# Altium PCB kijek.PcbDoc
Units mil, origin at the board's own origin, x right, y up, seen from the top; angles counter-clockwise.
Board outline 3346.46 x 826.77 mil, 2 copper layers (Top Layer, Bottom Layer); 72 components, 60 nets, 274 pads, 79 vias.
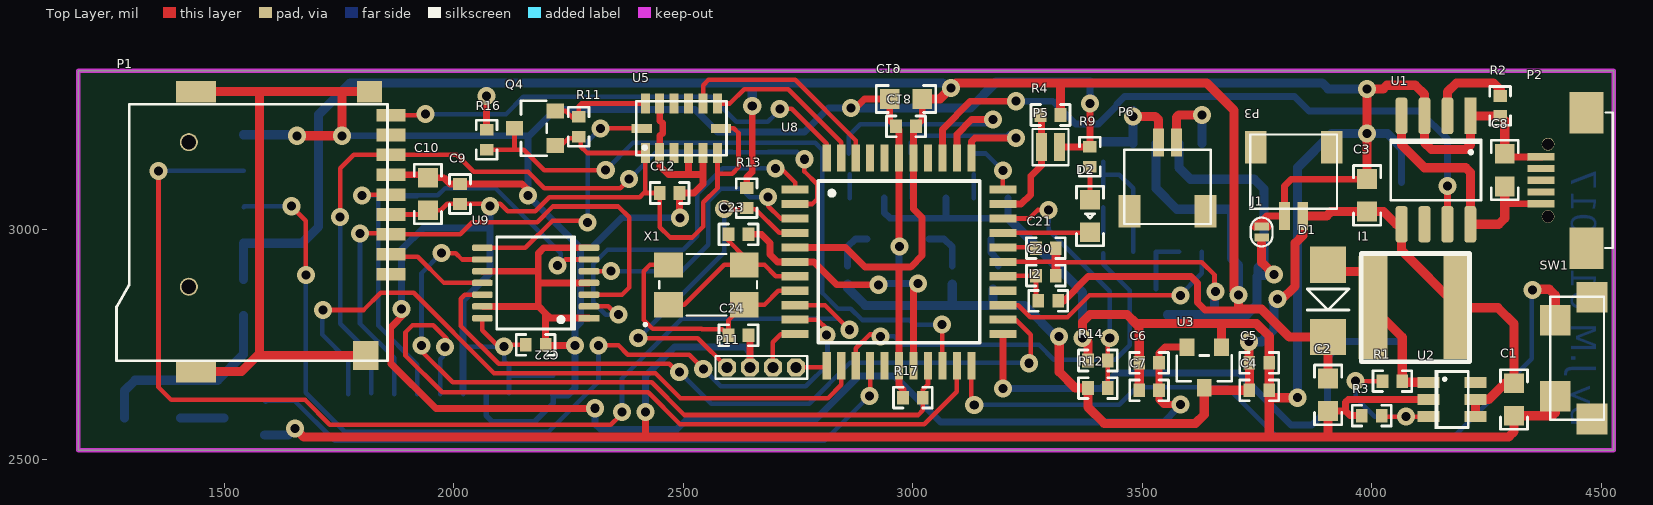
[diagram p0: Top Layer view]
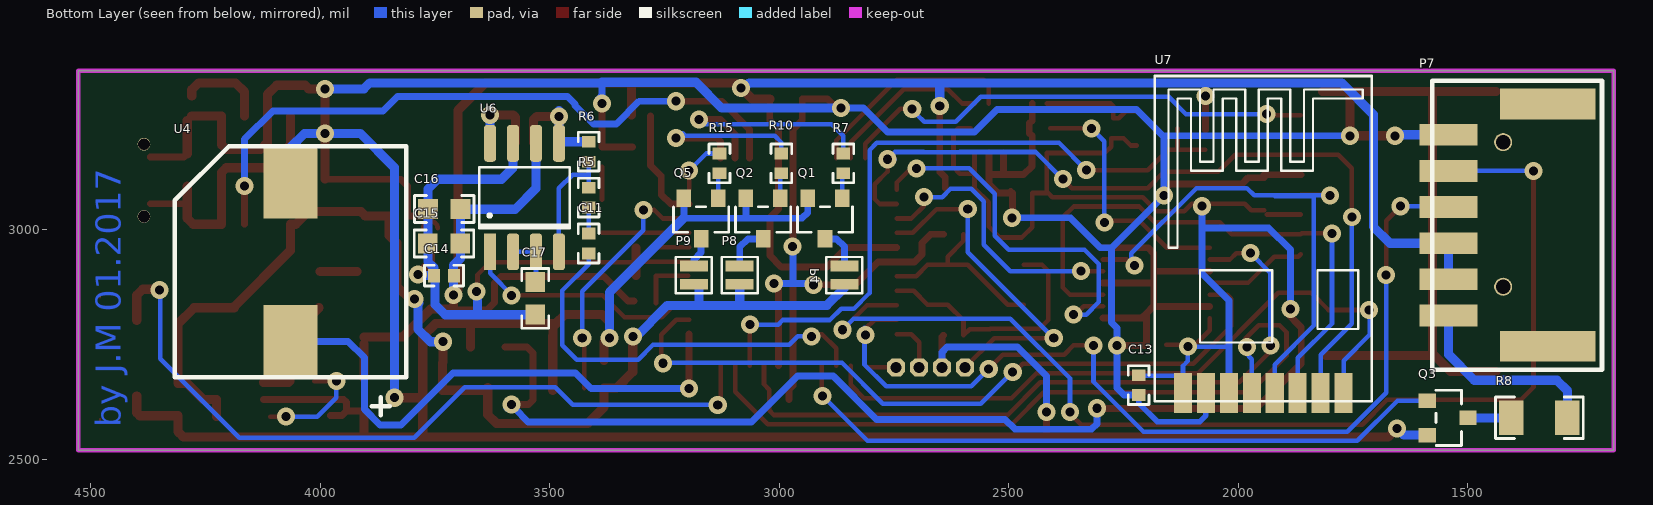
[diagram p1: Bottom Layer view, seen from below]

## Layer stack, top to bottom
Top Layer: signal copper 1.4
Dielectric: dielectric 12.6, FR-4, Dk 4.8
Bottom Layer: signal copper 1.4

## Board outline
1181.1,2519.68 1181.1,3346.46 4527.56,3346.46 4527.56,2519.68

## Design rules (kind name [scope] priority, off if disabled: settings)
Clearance [All] p1: gap=10
MinimumSolderMaskSliver [All] p1: minsoldermaskwidth=1
PolygonConnect [All] p1: connectstyle=Relief reliefconductorwidth=10 reliefentries=4 polygonreliefangle="90 Angle" airgapwidth=10
RoutingVias [All] p1: holewidth=19.68 width=39.37 viastyle="Through Hole" minholewidth=19.68 minwidth=39.37 maxholewidth=28 maxwidth=50
SolderMaskExpansion [All] p1: expansion=4
Width [All] p1: maxlimit=20 minlimit=10 preferedwidth=10
27 further rules are at their usual default settings.

## Components (designator, comment, footprint, x,y, rotation, side; value= is the part's Value field where it differs from the comment)
C1 "22uF" C0603 4310,2630 r270 top
C2 "22uF" C0603 3905,2640 r270 top
C3 "4,7uF" C0603 3990,3074.78 r90 top
C4 "1uF" C0402 3755,2650 r0 top
C5 "100nF" C0402 3755,2710 r0 top
C6 "100nF" C0402 3515,2710 r180 top
C7 "1uF" C0402 3515,2650 r180 top
C8 "4,7uF" C0603 4290,3130 r90 top
C9 "100nF" C0402 2013.15,3077.87 r90 top
C10 "4,7uF" C0603 1943.15,3077.87 r90 top
C11 "470nF" C0402 3415,2970 r90 bottom
C12 "100nF" C0402 2470,3080 r0 top
C13 "100nF" C0402 2216.54,2661.42 r270 bottom
C14 "100nF" C0402 3730.43,2900 r0 bottom
C15 "4,7uF" C0603 3730.43,2970 r0 bottom
C16 "4,7uF" C0603 3730,3045 r0 bottom
C17 "4,7uF" C0603 3531.5,2850.39 r270 bottom
C18 "100nF" C0402 2985,3225 r180 top
C19 "4,7uF" C0603 2985,3285 r180 top
C20 "100nF" C0402 3290,2900 r180 top
C21 "100nF" C0402 3290,2960 r0 top
C22 "100nF" C0402 2178.07,2748.98 r0 top
C23 "22pF" C0402 2620,2990 r180 top
C24 "22pF" C0402 2620,2770 r0 top
D1 "SS34" SMA 3905,2845 r90 top
D2 "RED" LED0603 3386,3030 r90 top
I1 "22uH" 6x6x2.8mm 4095,2830 r180 top
I2 "10uH" I0402 3295,2845 r180 top
J1 "SOLDER_JUMPER" SOLDER_JUMPER 3760,2995 r90 top
P1 "MICROSD" MICROSD 1863.15,2860 r0 top
P2 "USB" MICRO_USB_2 4468,2960 r90 top
P3 "A1001WR-S-2P" A1001WR-S-2P 3830,3105 r180 top
P4 "Header 2" 2MM-SMD 2858,2901 r90 bottom
P5 "Header 2" 2MM-SMD 3300,3180 r0 top
P6 "A1001WR-S-2P" A1001WR-S-2P 3555,3115 r0 top
P7 "CON" MX-502352-0600 1433.15,3010 r90 bottom
P8 "Header 2" 2MM-SMD 3086,2901 r90 bottom
P9 "Header 2" 2MM-SMD 3186,2901 r90 bottom
P11 "DEBUG" PAD_4-1 2670,2700 r0 top
Q1 "BC847B" SOT23 2900,3024.49 r0 bottom
Q2 "BC847B" SOT23 3035,3024.49 r0 bottom
Q3 "2N7002" SOT23 1543.15,2590 r270 bottom
Q4 "2N7002" SOT23 2176.26,3221.06 r90 top
Q5 "BC847B" SOT23 3170,3024.49 r0 bottom
R1 "100K" R0402 4045,2670 r180 top
R2 "1K2" R0402 4280,3270 r90 top
R3 "15K" R0402 4000,2595 r180 top
R4 "10k" R0402 3300,3250 r0 top
R5 "20K" R0402 3415,3070 r90 bottom
R6 "20K" R0402 3415,3170 r90 bottom
R7 "9K6" R0402 2860,3144.49 r90 bottom
R8 "16R" R1206 1343.15,2590 r0 bottom
R9 "1K" R0402 3386,3159 r90 top
R10 "9K6" R0402 2995,3144.49 r90 bottom
R11 "4K7" R0402 2271.65,3224.41 r90 top
R12 "1M" R0402 3403.35,2655 r180 top
R13 "10K" R0402 2638,3069 r270 top
R14 "1M" R0402 3403.35,2715 r180 top
R15 "9K6" R0402 3130,3144.49 r90 bottom
R16 "4K7" R0402 2071.26,3196.06 r270 top
R17 "4K7" R0402 3000,2633.86 r0 top
SW1 "SW_3x6x3.5mm" 3x6x3.5mm 4440,2720 r270 top
U1 "TP4056" SO-8 4140,3130 r270 top
U2 "MT3608" SOT-23-6 4175,2630 r270 top
U3 "XC6206" SOT23 3635,2700 r180 top
U4 "SMB07" SMB07 4065,2930 r90 bottom
U5 "ADXL345" LGA_CC-14 2495.63,3221.06 r90 top
U6 "LM4871" SO-8 3555,3070 r90 bottom
U7 "NRF24L01" NRF24L01 1945,2644 r90 bottom
U8 "ATmega644" TQFP-44A 2970,2930 r0 top
U9 "74LCV125" TSSOP-14 2178.07,2883.98 r180 top
X1 "18,432MHz" CFPX-104 2550,2880 r0 top

## Footprints (in the part's own frame and the unit in brackets; to place one, negate y for a bottom-side part, rotate by r counter-clockwise, add the part's x,y. Pads: shape width x height; smd on the part's side, far side on the other; paste and mask are expansions set on the pad)
2MM-SMD [mm]
  rect 0.6x1.55 smd: 1(-0.5,0) 2(0.5,0)
  silkscreen extent -1,-1 1,1
3x6x3.5mm [mm]
  rect 1.7x1.7 smd: 1(-2.1,-1.016) 2(2.1,-1.016) 3(-3.37,1.016) 3(3.37,1.016)
  Top Layer lines w0.127: 3.4,1.016 3.37,1.016 ; -3.37,1.016 -3.4,1.016
  silkscreen extent -3.4,-1.3 3.4,1.68, body extent -3.9,-1.1 3.9,2.5, height 3.5
6x6x2.8mm [mm]
  rect 1.6x5.7 smd: 1(-2.35,0) 2(2.35,0)
  silkscreen extent -3,-3 3,3, body extent -3,-3 3,3, height 2.8
A1001WR-S-2P [mm]
  rect 0.6x1.55 smd: 1(-0.5,1.9) 2(0.5,1.9)
  rect 1.2x1.8 smd: 3(-2.1,-1.9) 3(2.1,-1.9)
  silkscreen extent -2.4,-2.6 2.4,1.5, body extent -2.46,-2.66 2.46,1.56, height 2.9
C0402 [mm] "Chip Resistor, Body 1.0x0.5mm, IPC Low Density"
  rect 0.65x0.75 smd: 1(-0.55,0) 2(0.55,0)
  silkscreen extent -1.07,-0.58 1.07,0.58, body extent -0.52,-0.28 0.53,0.28, height 0.4
C0603 [mm] "Chip Resistor, Body 1.6x0.8mm, IPC Low Density"
  rect 1.1x1.1 smd: 1(-0.9,0) 2(0.9,0)
  silkscreen extent -1.65,-0.75 1.65,0.75, body extent -0.85,-0.47 0.85,0.47, height 0.6
CFPX-104 [mm]
  rect 1.6x1.4 smd: 1(-2.1,-1.1) 1(2.1,1.1) 2(-2.1,1.1) 2(2.1,-1.1)
  silkscreen extent -3.45,-2.28 2.8,1.7, body extent -2.5,-1.6 2.5,1.6, height 1
I0402 [mm] "Chip Resistor, Body 1.0x0.5mm, IPC Low Density"
  rect 0.65x0.75 smd: 1(-0.55,0) 2(0.55,0)
  silkscreen extent -1.08,-0.58 1.07,0.58, body extent -0.52,-0.28 0.53,0.28, height 0.4
LED0603 [mm] "Chip Diode Led, Body 1.6x0.8mm, IPC Low Density"
  rect 1.1x1.1 smd: 1(-0.9,0) 2(0.9,0)
  silkscreen extent -1.65,-0.75 1.65,0.75, body extent -0.85,-0.47 0.85,0.47, height 0.6
LGA_CC-14 [mm]
  rect 1.118x0.5 smd mask+0.025: 1(-1.371,2) 2(-1.371,1.2) 3(-1.371,0.4) 4(-1.371,-0.4) 5(-1.371,-1.2) 6(-1.371,-2) 8(1.371,-2) 9(1.371,-1.2) 10(1.371,-0.4) 11(1.371,0.4) 12(1.371,1.2) 13(1.371,2)
  rect 0.5x1.118 smd mask+0.025: 7(0,-2.2) 14(0,2.2)
  silkscreen extent -1.5,-2.5 1.5,2.5, body extent -1.58,-2.58 1.58,2.58, height 1
MICRO_USB_2 [mm]
  rect 2.3x1.9 smd: 0(0,0) 0(7.5,0)
  rect 0.4x1.5 smd: 1(2.45,2.525) 2(3.1,2.525) 3(3.75,2.525) 4(4.4,2.525) 5(5.05,2.525)
  round 0.7 hole 0.65: 6(1.75,2.125) 7(5.75,2.125)
  silkscreen extent 0,-1.45 7.5,-1.02, body extent -0.29,-2.73 7.79,2.83, height 2.77
MICROSD [mm]
  rect 1.6x0.7 smd: 1(0,1.1) 2(0,2.2) 3(0,3.3) 4(0,4.4) 5(0,5.5) 6(0,6.6) 7(0,7.7) 8(0,8.8) 9(0,9.9)
  rect 2.2x1.2 smd: 10(-10.8,-4.3) 10(-10.8,11.2)
  rect 1.4x1.6 smd: 10(-1.4,-3.4)
  rect 1.4x1.2 smd: 10(-1.2,11.2)
  round 1 hole 0.8: 14(-11.2,0.4) 14(-11.2,8.4)
  silkscreen extent -15.2,-3.7 -0.2,10.5, body extent -15.2,-3.7 -0.2,10.5, height 1.7
MX-502352-0600 [mm]
  rect 1.7x5.3 smd: 0(-6.7,-2.75) 0(6.7,-2.75)
  rect 1.2x3.2 smd: 1(5,2.75) 2(3,2.75) 3(1,2.75) 4(-1,2.75) 5(-3,2.75) 6(-5,2.75)
  silkscreen extent -8,-5.75 8,3.65, body extent -8.13,-5.88 8.13,3.78, height 6.4
NRF24L01 [mm]
  rect 2.2x1 smd: 1(0,4.445) 2(0,3.175) 3(0,1.905) 4(0,0.635) 5(0,-0.635) 6(0,-1.905) 7(0,-3.175) 8(0,-4.445)
  silkscreen extent -0.45,-6 17.55,6, body extent -0.53,-6.08 17.63,6.08, height 1.85
PAD_4-1 [mm]
  oct 1x1 hole 0.6: 1(-1.905,0) 2(-0.635,0) 3(0.635,0) 4(1.905,0)
  silkscreen extent -2.54,-0.64 2.54,0.64
R0402 [mm] "Chip Resistor, Body 1.0x0.5mm, IPC Low Density"
  rect 0.65x0.75 smd: 1(-0.55,0) 2(0.55,0)
  silkscreen extent -1.07,-0.58 1.07,0.58, body extent -0.52,-0.28 0.53,0.28, height 0.4
R1206 [mm] "Chip Resistor, Body 3.2x1.6mm, IPC Low Density"
  rect 1.35x1.9 smd: 1(-1.55,0) 2(1.55,0)
  silkscreen extent -2.42,-1.15 2.42,1.15, body extent -1.67,-0.87 1.67,0.87, height 0.75
SMA [mil]
  rect 79x79 smd: 1(-78.87,0) 2(78.87,0)
  silkscreen extent -20,-46 26,46, body extent -98,-53 98,53, height 87
SMB07 [mm]
  rect 4x3 smd: 1(-4.4,0) 2(4.4,0)
  silkscreen extent -8.5,-6.4 6.4,6.4, body extent -6.4,-6.4 6.4,6.4, height 6.5
SO-8 [mil]
  rect 80x26 smd: 1(-118.11,75)
  rrect50% 80x26 smd: 2(-118.11,25) 3(-118.11,-25) 4(-118.11,-75) 5(118.11,-75) 6(118.11,-25) 7(118.11,25) 8(118.11,75)
  silkscreen extent -66,-98 66,98, body extent -121,-96 121,96, height 68
SOLDER_JUMPER [mm]
  rect 0.45x0.8 smd: 1(0.3,0) 2(-0.3,0)
  Top Layer lines w0.254: 0.2,0.4 cw(c0.2,0) 0.6,0.008 cw(c0.2,0) 0.6,0 cw(c0.2,0) 0.3,-0.387 cw(c0.2,0) 0.2,-0.4
  silkscreen extent -0.8,-0.6 0.8,0.6
SOT23 [mil]
  rect 32x38 smd: 1(-37.6,-44.33) 2(37.6,-44.33) 3(0,44.33)
  silkscreen extent -60,-26 60,30, body extent -57,-49 57,48, height 40
SOT-23-6 [mm]
  rect 0.6x1.2 smd: 1(-0.95,-1.3) 2(0,-1.3) 3(0.95,-1.3) 4(0.95,1.3) 5(0,1.3) 6(-0.95,1.3)
  silkscreen extent -1.63,-0.98 1.62,0.9, body extent -1.5,-1.5 1.5,1.5, height 1.3
TQFP-44A [mm] "QFP; 44 Leads; Body 10 x 10 mm; Pitch 0.8 mm"
  rect 1.5x0.45 smd: 1(-5.75,4) 2(-5.75,3.2) 3(-5.75,2.4) 4(-5.75,1.6) 5(-5.75,0.8) 6(-5.75,0) 7(-5.75,-0.8) 8(-5.75,-1.6) 9(-5.75,-2.4) 10(-5.75,-3.2) 11(-5.75,-4) 23(5.75,-4) 24(5.75,-3.2) 25(5.75,-2.4) 26(5.75,-1.6) 27(5.75,-0.8) 28(5.75,0) 29(5.75,0.8) 30(5.75,1.6) 31(5.75,2.4) 32(5.75,3.2) 33(5.75,4)
  rect 0.45x1.5 smd: 12(-4,-5.75) 13(-3.2,-5.75) 14(-2.4,-5.75) 15(-1.6,-5.75) 16(-0.8,-5.75) 17(0,-5.75) 18(0.8,-5.75) 19(1.6,-5.75) 20(2.4,-5.75) 21(3.2,-5.75) 22(4,-5.75) 34(4,5.75) 35(3.2,5.75) 36(2.4,5.75) 37(1.6,5.75) 38(0.8,5.75) 39(0,5.75) 40(-0.8,5.75) 41(-1.6,5.75) 42(-2.4,5.75) 43(-3.2,5.75) 44(-4,5.75)
  silkscreen extent -4.47,-4.47 4.48,4.48, body extent -6,-6 6,6, height 1.1
TSSOP-14 [mil]
  rect 45x14 smd: 1(-116.14,76.77)
  rrect50% 45x14 smd: 2(-116.14,51.18) 3(-116.14,25.59) 4(-116.14,0) 5(-116.14,-25.59) 6(-116.14,-51.18) 7(-116.14,-76.77) 8(116.14,-76.77) 9(116.14,-51.18) 10(116.14,-25.59) 11(116.14,0) 12(116.14,25.59) 13(116.14,51.18) 14(116.14,76.77)
  silkscreen extent -87,-100 85,100, body extent -126,-100 126,100, height 47

## Part data
C1 C2 C3 C4 C5 C6 C7 C8 C9 C10 C11 C12 C13 C14 C15 C16 C17 C18 C19 C20 C21 C22 C23 C24: library part Cap, "Capacitor"
D1: library part Diode
D2: library part LED_RED, "LED"
I1 I2: library part Inductor
J1 P3 P4 P5 P6 P8 P9: "Header, 2-Pin"
P2: library part USB_2.0
P7: library part "Header 6", "Header, 6-Pin"
P11: library part "Header 4", "Header, 4-Pin"
Q1 Q2 Q5: library part BC847C(BEC), "NPN"
Q3 Q4: library part 2N7002(GSD), "N-MOSFET"
R1 R2 R3 R4 R5 R6 R7 R8 R9 R10 R11 R12 R13 R14 R15 R16 R17: library part Res, "Resistor"
U4: library part BUZ_SMB07
U8: "TQFP - 44pin / MLF - 44pin"
U9: "BUFFERS (3-STATE)"
X1: library part Crystal

## Via types
v1: diameter 39.37, hole 19.68, Top Layer to Bottom Layer, 79 vias

## Nets (pads, with @x,y where several pads share a name; then routed paths per layer and width w, separated by ;. In a path a pad name is that pad's centre, name@x,y a point inside that pad or via, vN(x,y) a via of type N, cw(c..) or ccw(c..) an arc to the next point about the centre after c; other vN are vias at no path point)
3V3: C6.1 C7.1 C9.1 C10.1 C12.1 C13.1 C22.1 P1.4 Q4.1 R11.1 U3.2 U5.1 U5.6 U5.7 U7.1 U7.3 U9.14 | length 4922.7
  Top Layer w10: P1.4 C10.1@1937.01,3033.23 ; C10.1 1971.57,3042.44 1985.35,3056.22 C9.1 2101.26,3056.22 2117.36,3040.12 2176.83,3040.12 2207.27,3070.55 2404.44,3070.55 2413.89,3080 2419.89,3080 ; U9.14 2061.93,2780.59 2093.54,2748.98 C22.1 ; Q4.1 2233.66,3183.46 2249.61,3199.41 2276.26,3199.41 2276.26,3181.06 2290.23,3167.09 U5.1 2416.89,3083 2419.89,3080 ; U5.6 2574.37,3122.05 ; U5.7 2609.65,3221.06 2620,3210.71 2620,3135.75 2606.3,3122.05 2574.37,3122.05 ; 2419.89,3080 C12.1 2448.35,3005.65 2471,2983 2519.31,2983 2543.31,3007 2543.31,3059.49 2574.37,3090.55 2574.37,3122.05
  Top Layer w15: v1(1885.83,2826.77) 1893.7,2818.9 1862.2,2787.4 1862.2,2708.66 1960.63,2610.24 2307.78,2610.24 v1(2307.09,2610.93) ; v1(3583,2619) 3546.65,2619 3536.65,2629 C7.1 C6.1 3536.65,2731.65 3549.33,2744.33 U3.2
  Bottom Layer w10: U7.3@2019.88,2641.73 U7.3@2019.88,2652 ; 2019.88,2745 2019.92,2745.04 v1(2109.17,2745.04) 2109.17,2713.83 2120,2703 U7.1@2120,2682 ; U7.1 U7.1@2120,2682 ; C13.1@2216.54,2682 U7.1@2120,2682
  Bottom Layer w15: v1(1885.83,2826.77) 1885.83,2956.69 1933.07,3003.94 2078.74,3003.94 ; U7.3@2019.88,2652 2019.88,2745 2019.88,2846.14 2078.74,2905 2078.74,3003.94 ; v1(2078.74,3051.18) 2078.74,3003.94 ; v1(2307.09,2610.93) 2307.09,2576.91 2318.83,2565.17 2486.12,2565.17 2507.56,2586.61 2787.61,2586.61 2882.1,2681.1 2960,2681.1 3060.18,2580.93 3546.93,2580.93 3577,2611 v1@3593,2611
5V: C2.1 C14.1 C15.1 C16.1 C18.1 C19.1 D1.1 I2.1 P7.4 P7.5 R4.2 R13.1 R16.1 R17.1 U6.6 U8.5 U8.17 U8.38 | length 5686.6
  Top Layer w15: R16.1 v1(2071.26,3291.06) ; R13.1 2638,3114 2650,3126 v1(2650,3270) ; U8.5 2853.5,2961.5 2896,2919 2994.41,2919 2995.6,2920.19 2996.68,2920.19 3020,2943.5 3020,3027 3001.5,3045.5 U8.38 3001.5,3219.84 C18.1 3020.43,3238.78 C19.1 ; U8.17 2970,2660 2978.35,2651.65 R17.1@2978.35,2630 ; U8.17@2970,2717.62 2970,2919 ; I2.1 3329.25,2845 3381.89,2897.64 3606.36,2897.64 3620.19,2883.81 3620.19,2841.6 ; 3620,2841.41 3636.53,2824.88 3734.33,2824.88
  Top Layer w20: C19.1 3059,3285 3094,3320 3320,3320 ; R4.2 3321.65,3318.35 3320,3320 ; C2.1 D1.1@3905,2751.13 ; D1.1 3820.61,2766.13 3759.86,2826.88 3710,2826.88 v1(3710,2857.44) 3700,2867.44 3700,3260 3640,3320 3320,3320
  Bottom Layer w15: v1(2071.26,3291.06) 2071.26,3319
  Bottom Layer w20: P7.5 P7.4 1668.78,2970.63 1705,3006.85 1705,3251 1774,3320 2649,3320 ; v1(2650,3270) 2650,3319 2649,3320 ; v1@3085,3300 3065,3320 2649,3320 ; U6.6 3530,3090 3575.43,3044.57 C16.1@3694.57,3044.57 ; C16.1 C16.1@3694.57,3044.57 ; v1(3710,2857.44) 3710,2922.57 3694.57,2938 C16.1@3694.57,3044.57
  other v1: 3083,3309
AGND: C14.2 C15.2 C16.2 C17.2 C20.1 C21.2 J1.2 U6.7 U8.28 | length 1508.4
  Top Layer w10: U8.28 3311.65,2930 ; 3311.65,2929.13 3629.92,2929.13 3657.48,2901.57 v1@3657.48,2854.33
  Top Layer w20: 3311.65,2929.13 C20.1 C21.2 ; v1@3657.48,2854.33 3660,2856.85 v1(3660,2865) ; 3760,2971.38 3760,2929 v1(3787,2902)
  Bottom Layer w20: 3555,2814.57 3657.48,2814.57 ; U6.7 3580,3135 3605,3110 3744,3110 3765.43,3088.57 C16.2 3765.43,2930.43 3752.09,2917.09 C14.2 ; v1(3660,2865) 3657.48,2862.48 3657.48,2814.57 ; v1(3787,2902) 3785,2900 C14.2 ; 3657.48,2814.57 3727.57,2814.57 3749.68,2836.68 3749.68,2869.07 3750.31,2869.7 3750.31,2898.23 C14.2
BAT: C1.1 C3.1 C4.1 C5.1 I1.1 P3.1 P4.1 P8.1 P9.1 R12.2 U1.5 U2.4 U2.5 U3.3 | length 2565.7
  Top Layer w20: v1(3318.89,2767.71) 3318.89,2690.11 3354,2655 R12.2 3381.69,2613.31 3417,2578 3616,2578 3635,2597 U3.3 ; U3.3@3640.67,2650 C4.1 C5.1 3732.28,2711.06 v1(3732.28,2755.91) ; v1(3795,2849) 3793,2849 3789.37,2852.63 3789.37,2845.63 3790,2845 3800.83,2845 3833,2877.17 3833,2970.8 3849.68,2987.48 P3.1 3902.2,3030.2 3911.35,3039.35 C3.1 4026,3039.35 4053.46,3011.89 U1.5 4065,2955 4187.52,2832.48 I1.1 4275,2830 4310,2795 C1.1 4290.43,2665.43 4255,2630 U2.5 U2.4
  Bottom Layer w20: P4.1 2858,2873 2896,2835 3087,2835 ; P8.1 3086,2836 3087,2835 ; P9.1@3175,2870.32 3175,2835 ; v1@3314.97,2763.77 3243.74,2835 3175,2835 ; v1(3732.28,2755.91) 3759.84,2755.91 3787.39,2783.46 3787.39,2837.61 3785,2840 3790,2845 3789.37,2845.63 3789.37,2852.63 3793,2849 v1(3795,2849) ; 3087,2835 3175,2835
GND: C1.2 C2.2 C3.2 C4.2 C5.2 C6.2 C7.2 C8.2 C9.2 C10.2 C12.2 C13.2 C18.2 C19.2 C22.2 C23.1 C24.2 J1.1 P1.6 P1.10 P2.5 P3.2 P5.2 P7.1 P11.2 Q1.2 Q2.2 Q3.2 Q5.2 R2.1 R3.2 R9.2 R14.2 SW1.2 U1.1 U1.3 U2.2 U3.1 U4.2 U5.2 U5.4 U5.5 U5.12 U7.2 U8.6 U8.18 U8.39 U9.1 U9.4 U9.7 U9.10 U9.13 | length 15510.4
  Top Layer w15: P1.6 C10.2@1943.15,3119.84 ; C10.2 1977.72,3113.31 1991.5,3099.53 C9.2 2148.5,3099.53 v1@2167.32,3080.71 ; U9.13 2181.89,2832.8 2183.07,2833.98 ; U9.10 2183.66,2909.57 ; v1(2263.78,2748.03) 2200.67,2748.03 C22.2 2199.72,2817.32 ; U9.1 2209.84,2807.2 2199.72,2817.32 ; U9.4 2183.66,2883.98 ; U9.7 2195.75,2960.75 2183.66,2948.66 2183.66,2909.57 ; 2417,2553.74 v1@2417,2602.36 ; v1(2417.32,2602.36) v1@2417,2602.36 ; U5.12 2448.39,3238.29 2455,3231.67 2455,3210.45 2448.39,3203.84 U5.2 2449.31,3166.17 2449.31,3137.8 2467.1,3120 2542.87,3120 ; v1(2493,3026) 2491.65,3027.35 C12.2 2522.87,3080 2542.87,3100 2542.87,3120 ; C12.2@2495.19,3083.54 C12.2@2496.06,3082.67 ; 2511.38,3123.62 U5.4 ; U5.5 2542.87,3120 ; C24.2 2645,2766.65 P11.2 ; C23.1 2670,2990 2689,2971 2689,2946 2705,2930 U8.6 2785,2930 2835,2880 v1(2925,2880) ; v1(2865,3265) 2875,3265 2895,3285 C19.2 2949.57,3238.78 C18.2 2970,3218.35 U8.39 v1@2970,2963 ; U8.18 3001.5,2873.5 v1(3011,2883) ; P5.2 3385.35,3180 R9.2@3385.83,3180.48 ; R14.2 R14.2@3381.89,2715.2 ; v1@3385.83,3285.32 v1(3385.83,3275) R9.2@3385.83,3180.48 ; R9.2 R9.2@3385.83,3180.48 ; 3760,3018.62 3760,3019.2 3771,3030.2 P3.2 3810.31,3095.31 3825,3110 3989.78,3110 C3.2 ; C2.2 3943,2604.57 ; R3.2 3952.57,2595 3943,2604.57 ; U2.2 3949,2630 3943,2624 3943,2604.57 ; R2.1@4280.24,3248.11 R2.1@4290,3238.35 ; C8.2 4296.61,3158.82 P2.5@4370.59,3158.82 ; 2183.66,2883.98 2183.66,2909.57 ; 2183.66,2883.98 2183.66,2833.39 2199.72,2817.32 ; v1@2417,2602.36 2409.45,2602.36 2417,2609.9 v1@2417,2602.36
  Top Layer w20: P1.10@1437.95,2690.71 1536.71,2690.71 1572.14,2726.14 P1.10@1808.03,2726.14 ; P1.10@1437.95,3300.94 P1.10@1815.91,3300.94 ; 1576,2731.14 1576,3300.94 ; v1(1654,2567) 1673,2548 4298,2548 ; v1(1657.48,3204.72) v1(1755.91,3204.72) 1755.91,3297.01 ; v1(3370.08,2763.78) 3370.08,2799.21 3385.83,2814.96 3467.04,2814.96 3486.41,2795.59 ; R14.2@3381.89,2715.2 v1@3381.89,2755.91 ; C7.2 C6.2 3493.35,2768.35 3493,2768 3493,2789 3486.41,2795.59 ; U3.1 3672.6,2793.99 3671,2795.59 ; 3776.65,2549 C4.2 ; v1(3838.58,2633.86) 3776.65,2633.86 C4.2 ; 3905,2555 C2.2 ; C3.2 v1(3990,3210) v1(3990,3307) 4025,3307 4033,3315 4095,3315 4115,3295 U1.3 4115,3190 4130,3175 4205,3175 4215,3185 U1.1 R2.1@4280.24,3248.11 ; C8.2 R2.1@4290,3238.35 ; 4300,2550 4310,2560 C1.2 4393.57,2594.57 4400,2601 SW1.2 ; 3486.41,2795.59 3671,2795.59 ; 3671,2795.59 3748.72,2795.59 3776.65,2767.66 C5.2 C4.2
  Bottom Layer w12: U7.2@2069.88,2641.73 2069.88,2595.47 2083.35,2582 2176,2582 2216.54,2622.54 C13.2
  Bottom Layer w15: v1(1755.91,3204.72) 2163.83,3204.72 ; C13.2 2248.76,2639.76 2263.78,2654.78 v1(2263.78,2748.03) 2263.78,2786.19 2275.59,2798 2275.59,2960.63 ; v1(2417.32,2602.36) 2417.32,2681.1 2480.32,2744.09 2633.86,2744.09 2645,2732.95 P11.2 ; v1(2493,3026) 2365,3026 2299.63,2960.63 2275.59,2960.63 ; v1(2865,3265) 2816,3265 2763.81,3212.81 2574.19,3212.81 2524.88,3262.12 2221.23,3262.12 2163.83,3204.72 ; v1(2925,2880) 2928,2883 2970,2883 ; Q1.2 2937.6,3037.4 2950,3025 3075,3025 ; v1(2971,2963) 2970,2962 2970,2883 ; v1(3011,2883) 2970,2883 ; Q2.2 3072.6,3027.4 3075,3025 ; Q5.2 3207.6,3025.6 3207,3025 3075,3025 ; 3385.83,3321.27 3385.83,3293.19 v1@3393.7,3285.32 ; U4.2 U4.2@4065,3179.09 ; 2163.83,3204.72 2161.42,3202.31 v1(2161.42,3074.8) 2275.59,2960.63
  Bottom Layer w20: P7.1 1655.35,3206.85 v1(1657.48,3204.72) ; Q3.2 1639.02,2552.4 ; v1(2865,3265) 3125,3265 3181.27,3321.27 3385.83,3321.27 ; 3207.6,3025.6 3370,2863.2 v1@3370,2769.6 ; 3385.83,3320 3892,3320 3905,3307 v1(3990,3307) ; v1(3838.58,2633.86) 3838.58,3135.58 3913,3210 v1(3990,3210) 4034.09,3210 U4.2@4065,3179.09
NetC8_1: C8.1 P2.1 U1.4 U1.8 | length 582.3
  Top Layer w15: 4291.46,3056.46 P2.1@4370.59,3056.46
  Top Layer w20: U1.4 4065,3185 4115,3135 4205,3135 4215,3125 4215,3100 U1.8 4276.89,3011.89 4290,3025 4290,3055 ; C8.1 4290,3055 ; 4291.46,3056.46 4290,3055
NetC11_1: C11.1 U8.14 | length 906.9
  Top Layer w10: U8.14 2875.51,2741.46 2905.71,2771.65 2925.19,2771.65 v1(2929.13,2767.71)
  Bottom Layer w10: v1(2929.13,2767.71) 2959.29,2767.71 2978,2749 3275,2749 3307,2717 3441.41,2717 3472.44,2748.03 3472.44,2867.56 3415,2925 C11.1
NetC11_2: C11.2 R5.1 | length 56.7
  Bottom Layer w10: C11.2 R5.1
NetC17_1: C17.1 U6.2 U6.3 | length 131.5
  Bottom Layer w10: C17.1@3530,2870.43 U6.3 U6.2
NetC20_2: C20.2 I2.2 U8.27 | length 130.5
  Top Layer w10: U8.27@3197.87,2900 C20.2 I2.2@3268.35,2840
NetC21_1: C21.1 U8.29 | length 70.5
  Top Layer w10: U8.29 C21.1@3266.85,2961.5
NetC23_2: C23.2 U8.7 X1.1 | length 403.4
  Top Layer w10: X1.1@2467.32,2836.69 2502.05,2836.69 2588.66,2923.31 X1.1@2632.68,2923.31 ; C23.2 2598.35,2975.65 2632.68,2941.32 X1.1@2632.68,2923.31 ; U8.7 2701.5,2898.5 2676.69,2923.31 X1.1@2632.68,2923.31
NetC24_1: C24.1 U8.8 X1.2 | length 569.1
  Top Layer w10: X1.2@2467.32,2923.31 2427.24,2923.31 2413.39,2909.45 2413.39,2803.15 2432.76,2783.78 2539.5,2783.78 2539.82,2783.46 2584.88,2783.46 C24.1 2598.35,2802.36 2632.68,2836.69 2676.69,2836.69 2707.01,2867.01 U8.8
NetD1_2: D1.2 I1.2 R1.1 U2.1 | length 324.8
  Top Layer w20: D1.2@3920,2908.87 I1.2@4000,2908.87 ; I1.2 4066.65,2765.83 R1.1 4069.25,2667.4 U2.1
NetD2_1: D2.1 U8.30 | length 189.6
  Top Layer w10: U8.30 D2.1@3386,2992.99
NetD2_2: D2.2 R9.1 | length 71.9
  Top Layer w10: D2.2 R9.1
NetP1_2: P1.2 U9.11 | length 224.7
  Top Layer w10: P1.2 1868.82,2940.94 1921.26,2940.94 1978.23,2883.98 U9.11
NetP1_3: P1.3 U7.6 U9.3 | length 1250.8
  Top Layer w10: v1(1795.28,2992.13) 1860.94,2992.13 P1.3 2013.54,2989.92 2039.69,3016.06 2181.06,3016.06 2215.55,3050.55 2358.27,3050.55 2381.89,3026.93 2381.89,2874.02 2366.26,2858.39 U9.3
  Bottom Layer w10: v1(1795.28,2992.13) 1795.28,2795.28 1869.88,2720.67 U7.6@1869.88,2641.73
NetP1_5: P1.5 U7.5 U9.6 | length 1206.8
  Top Layer w10: v1(1799.21,3074.8) 1800.94,3076.54 P1.5 ; v1@2232.28,2925.2 2242.24,2935.16 U9.6
  Bottom Layer w10: v1(1799.21,3074.8) 1921.26,3074.8 ; U7.5@1919.88,2641.73 1919.88,2706.1 1834.65,2791.34 1834.65,3073.43 1919.88,3073.43 1921.26,3074.8 ; v1@2232.28,2925.2 2232.28,2948.82 2090.55,3090.55 1980.55,3090.55 1964.8,3074.8 1921.26,3074.8
  other v1: 2226,2922
NetP1_7: P1.7 U7.7 U8.2 | length 1782.9
  Top Layer w10: v1(1751.97,3027.56) 1751.97,3133.86 1781.26,3163.15 P1.7 2006.14,3163.15 2043.31,3125.98 2161.42,3125.98 2196.85,3090.55 2362.2,3090.55 v1(2381.89,3110.24) ; U8.2 2780.39,3055.98 2791.34,3066.93 2791.34,3099.36 2763.78,3126.92 v1(2763.78,3153.54)
  Bottom Layer w10: v1(1751.97,3027.56) 1751.97,2795.28 1819.88,2727.36 U7.7@1819.88,2644 ; v1@2377.95,3106.3 v1(2381.89,3110.24) 2440.94,3169.29 2606.25,3169.29 2606.45,3169.09 2684.89,3169.09 2685.09,3169.29 2748.03,3169.29 2755.91,3161.42 2748.03,3153.54 v1(2763.78,3153.54)
NetP1_9: P1.9 U8.44 | length 1090.5
  Top Layer w10: P1.9 1935.28,3249.76 v1(1937.48,3251.97) ; v1(2710,3263) 2702,3263 2701.22,3263.78 2736.22,3263.78 2812.52,3187.48 U8.44
  Bottom Layer w10: v1(1937.48,3251.97) 2113.34,3251.97 2151.37,3290 2560.39,3290 2615.08,3235.31 2684.13,3235.31 2700,3251.18 2700,3265 2702,3263 v1(2710,3263)
NetP4_2: P4.2 Q1.3 | length 91.4
  Bottom Layer w15: P4.2 2858,2963 2875.16,2980.16 Q1.3
NetP5_1: P5.1 R4.1 U8.32 | length 250
  Top Layer w15: U8.32 3235.98,3055.98 3257,3077 3257,3117 3280.32,3140.32 P5.1 R4.1@3280.32,3248.03
NetP6_1: P6.1 R6.2 U6.5 | length 259.6
  Top Layer w20: v1(3480,3247) 3528,3247 3535.32,3239.68 P6.1
  Bottom Layer w20: R6.2 3476.46,3191.65 U6.5 3480,3260 v1(3480,3247)
NetP6_2: P6.2 U6.8 | length 194.3
  Top Layer w20: P6.2 3574.69,3244.69 3580,3250 v1(3630,3250)
  Bottom Layer w20: U6.8 3630,3260 v1(3630,3250)
NetP7_2: P7.2 U8.9 | length 2517.5
  Top Layer w10: v1(1356.11,3128.11) 1356,3128 1356,2657 1384,2629 1675.59,2629 1729.59,2575 2342,2575 2361.85,2594.85 2354.34,2602.36 v1(2366.14,2602.36) ; U8.9 2808.49,2835.51 v1(2862,2782)
  Bottom Layer w10: v1(1356.11,3128.11) P7.2 ; v1(2366.14,2602.36) 2354.34,2602.36 2366.14,2614.16 2366.14,2676.14 2496,2806 2838,2806 v1(2862,2782)
NetP7_3: P7.3 U8.10 | length 2030.8
  Top Layer w10: v1(1645.67,3051.18) 1677.17,3019.68 v1(1677.17,2901.57) ; v1(2314.96,2748.03) 2358.57,2748.03 2379,2727.6 2512.56,2727.6 v1(2543.31,2696.85) ; U8.10 2791.93,2804.02 2812,2783.95 v1(2812,2771)
  Bottom Layer w10: P7.3 1543.23,3051.18 v1(1645.67,3051.18) ; v1(1677.17,2901.57) 1677.17,2644.83 1762,2560 2206,2560 2314.96,2668.96 v1@2314.96,2732.28 ; v1(2543.31,2696.85) 2581.16,2659 2767,2659 2814,2706 v1@2814,2786
NetP7_6: P7.6 R8.1 | length 436
  Bottom Layer w20: R8.1 1282.13,2648.98 1305.15,2672 1485.15,2672 1541.42,2728.27 P7.6
NetP8_2: P8.2 Q2.3 | length 99.8
  Bottom Layer w15: Q2.3 3067.84,2980.16 3086,2962 P8.2
NetP9_2: P9.2 Q5.3 | length 66.1
  Bottom Layer w15: Q5.3 3170,2950 3186,2934 P9.2
NetP11_1: P11.1 R13.2 U8.4 | length 755.8
  Top Layer w10: v1@2397.64,2763.78 2531.22,2763.78 P11.1 ; v1(2589,3045) 2657,3045 2709.01,2992.99 U8.4
  Bottom Layer w10: v1(2401.57,2763.78) 2589,2951.2 2589,3033.05 v1@2582.68,3039.37
NetP11_3: P11.3 U8.11 | length 115
  Top Layer w10: P11.3@2705,2700 2695,2710 2695,2755 2712.52,2772.52 U8.11
NetP11_4: P11.4 U8.12 | length 53.9
  Top Layer w10: P11.4@2755,2700 U8.12@2808.9,2700
NetQ1_1: Q1.1 R7.1 | length 51.6
  Bottom Layer w10: Q1.1 R7.1@2862.4,3120.43
NetQ2_1: Q2.1 R10.1 | length 51.6
  Bottom Layer w10: Q2.1 R10.1@2997.4,3120.43
NetQ3_1: Q3.1 U8.15 | length 1476.7
  Top Layer w10: v1@2905.51,2626.29 v1(2905.51,2637.8) 2907.01,2639.29 U8.15
  Bottom Layer w10: Q3.1@1590.07,2625 Q3.1 1652.4,2627.6 1740.32,2539.68 2807.4,2539.68 v1(2905.51,2637.8)
NetQ3_3: Q3.3 R8.2 | length 94.6
  Bottom Layer w20: R8.2 Q3.3
NetQ4_2: Q4.2 R11.2 U5.13 | length 228.7
  Top Layer w10: Q4.2 2243.66,3258.66 2259.61,3242.72 R11.2@2271.65,3242.72 ; R11.2 2271.65,3269.65 2277.04,3275.04 U5.13
NetQ4_3: Q4.3 R16.2 U8.20 | length 1502.7
  Top Layer w10: R16.2 2132,3174.41 2131.93,3174.48 ; Q4.3 2131.93,3174.48 ; v1(2330.71,3129.92) 2196.85,3129.92 2152.3,3174.48 2131.93,3174.48 ; U8.20 v1@3064.49,2777.09
  Bottom Layer w10: v1(2330.71,3129.92) 2390.08,3189.29 2614.54,3189.29 2614.73,3189.09 2676.6,3189.09 2676.8,3189.29 2787.09,3189.29 2803,3173.38 2803,2862 2837,2828 2865.05,2828 2889.9,2803.15 2992,2803.15 3002.15,2793 v1(3064,2793)
NetQ5_1: Q5.1 R15.1 | length 51.6
  Bottom Layer w10: Q5.1 R15.1@3132.4,3120.43
NetR1_2: R1.2 R3.1 U2.3 | length 286.3
  Top Layer w10: v1@3975,2670 R1.2@4013.35,2670 ; R3.1@4024.06,2592.6 v1(4075,2592.6) U2.3@4108.82,2592.6
  Bottom Layer w10: v1(3965,2670) 3965,2634 4006.4,2592.6 v1(4075,2592.6)
NetR2_2: R2.2 U1.2 | length 194.7
  Top Layer w20: U1.2 4165,3300 4185,3320 4265,3320 4280,3305 R2.2
NetR5_2: R5.2 R6.1 U6.4 | length 272.2
  Bottom Layer w10: R5.2 3415,3120 ; R6.1 3415,3120 ; U6.4 3480,3090 3450,3120 3415,3120
NetR7_2: R7.2 U8.35 | length 512.2
  Top Layer w15: U8.35 3095.98,3207.98 3128,3240 v1(3175,3240)
  Bottom Layer w10: R7.2 2860,3205 2885,3230 3165,3230 v1(3175,3240)
NetR10_2: R10.2 U8.34 | length 378.9
  Top Layer w15: U8.34 3127.48,3192.48 3135,3200 v1@3220,3200
  Bottom Layer w10: R10.2 2995,3190 3010,3205 3205,3205 v1@3210,3210
  other v1: 3225,3200
NetR12_1: R12.1 R14.1 U8.31 | length 552.1
  Top Layer w10: U8.31 3253.54,3024.49 3272.05,3043 v1(3296,3043) ; R12.1 R14.1 3425,2759.65 v1(3429.13,2763.78)
  Bottom Layer w10: v1(3296,3043) 3296,2999 3429.13,2865.87 v1(3429.13,2763.78)
NetR15_2: R15.2 U8.33 | length 123.1
  Top Layer w10: U8.33 v1(3196.38,3128.62)
  Bottom Layer w10: R15.2 3158.86,3166.14 v1(3196.38,3128.62)
NetR17_2: R17.2 U8.19 U9.9 | length 1582.8
  Top Layer w10: v1(1929.13,2748.03) 1929.13,2735.49 1997.02,2667.6 2430.83,2667.6 2502.18,2596.24 3011.59,2596.24 3021.65,2606.3 R17.2 3021.65,2651.65 3032.99,2662.99 U8.19 ; v1(1972.44,2948.82) 2003.94,2948.82 2017.6,2935.16 U9.9
  Bottom Layer w10: v1(1929.13,2748.03) 1929.13,2905.51 v1(1972.44,2948.82)
NetSW1_1: SW1.1 U8.22 | length 1737.1
  Top Layer w10: U8.22 3127.48,2624.49 v1(3133.86,2618.11)
  Top Layer w20: v1(4350,2869) 4351.08,2870.08 4386.92,2870.08 4400,2857 SW1.1
  Bottom Layer w10: v1(3133.86,2618.11) 3333.92,2618.11 3334.24,2618.43 3449.43,2618.43 3488,2657 3685,2657 3795.39,2546.61 4176.54,2546.61 4349,2719.08 4349,2881.13 4361.13,2869 v1(4350,2869)
NetU1_7: U1.7 U8.36 | length 1448.3
  Top Layer w15: U8.36 3064.49,3218.49 3126,3280 v1(3225,3280) ; U1.7 v1(4165,3095)
  Bottom Layer w15: v1@3222.5,3282.5 3225,3285 v1(3225,3280) 3305,3280 3355,3230 3405,3230 3445.32,3270.32 3445.32,3274.37 3460.95,3290 3832.05,3290 3863.05,3259 4103.2,3259 4165,3197.2 4165,3115
NetU4_1: U4.1 U8.23 | length 1189.6
  Top Layer w15: U8.23 3196.38,2673.7 3196.85,2673.23 v1(3196.85,2653.54)
  Bottom Layer w15: v1(3196.85,2653.54) 3409.54,2653.54 3444,2688 3711,2688 3824.2,2574.8 3870.08,2574.8 3904,2608.72 3904,2721 3939.77,2756.77 U4.1
NetU5_8: U5.8 U8.43 | length 365.1
  Top Layer w10: U5.8 2600.98,3275.04 2632.4,3306.46 2728.54,3306.46 2844.02,3190.98 U8.43
NetU5_9: U5.9 U8.42 | length 470
  Top Layer w10: U5.9 2542.87,3314.76 2554.57,3326.46 2743.54,3326.46 2875.51,3194.49 U8.42
NetU5_14: U5.14 U9.8 | length 562
  Top Layer w10: U9.8 2155.75,2960.75 2214.68,3019.68 2287.39,3019.68 v1(2291.33,3015.74) ; v1(2318.9,3220.47) 2319.49,3221.06 U5.14
  Bottom Layer w10: v1(2291.33,3015.74) 2291.33,3137.79 2291.34,3192.91 v1(2318.9,3220.47)
NetU6_1: U6.1 U8.25 | length 545
  Top Layer w10: U8.25 3229.49,2835.51 3256,2809 3337,2809 3385,2857 3576.72,2857 3583,2850.72 v1(3583,2857)
  Bottom Layer w10: v1@3579.03,2854.32 3630,2905.29 U6.1
NetU7_4: U7.4 U8.21 | length 1612.1
  Top Layer w10: v1@1984.23,2744.09 1984.23,2762.35 1954.93,2791.65 1909.54,2791.65 1894.44,2776.56 1894.44,2725.56 1974.33,2645.67 2423.06,2645.67 2492.49,2576.24 3025.24,2576.24 3095.98,2646.98 U8.21
  Bottom Layer w10: U7.4@1969.88,2641.73 1969.88,2717.91 1976.38,2724.41
  other v1: 1980.31,2744.09
NetU7_8: U7.8 U8.13 | length 1501
  Top Layer w10: v1(1715,2825) 1802.8,2825 1840,2862.2 1912.66,2862.2 2087.27,2687.6 2439.11,2687.6 2493.71,2633 2815,2633 2844.02,2662.02 U8.13
  Bottom Layer w10: v1(1715,2825) 1712.6,2822.6 1712.6,2771.65 1769.88,2714.37 U7.8@1769.88,2641.73
NetU8_1: U8.1 U9.2 | length 819.1
  Top Layer w10: U9.2 2336.5,2832.8 v1@2358.27,2811.02 ; v1@2712.6,3133.86 2743.62,3102.83 U8.1
  Bottom Layer w10: v1(2358.27,2814.96) 2330.71,2814.96 2303.15,2842.52 2303.15,2925.2 2334.65,2956.69 2500,2956.69 2530,2986.69 2530,3078 2585.86,3133.86 v1(2700.79,3133.86)
NetU8_3: U8.3 U9.5 | length 617
  Top Layer w10: U9.5 v1(2342.4,2909.57) ; v1(2684.41,3070.87) 2685.04,3070.24 2685.04,3051.18 2711.73,3024.49 U8.3
  Bottom Layer w10: v1(2342.4,2909.57) 2496.18,2909.57 2554,2967.39 2554,3062 2581,3089 2626.57,3089 2644.71,3070.87 v1(2684.41,3070.87)
NetU8_24: U8.24 U9.12 | length 1647
  Top Layer w10: U9.12 2023.74,2858.39 2015,2849.65 2015,2790.16 2097.56,2707.6 2469.57,2707.6 v1@2492.13,2685.04 ; U8.24 3224.48,2804.02 3257.37,2771.13 3257.37,2718 3254,2718 3253,2717 v1(3253,2709)
  Bottom Layer w10: v1@2480.31,2692.91 2489.09,2692.91 2561,2621 2774,2621 2863,2710 3265.37,2710 3257.37,2718 3254,2718 3253,2717 v1(3253,2709)
  other v1: 2491,2690
pads on no net: P1.1 P1.8 P1.14 P2.0 P2.2 P2.3 P2.4 P2.6 P2.7 P3.3 P6.3 P7.0 SW1.3 U1.6 U2.6 U5.3 U5.10 U5.11 U8.16 U8.26 U8.37 U8.40 U8.41

## Keep-outs
Keep-Out Layer:
  lines w10: 2165.35,2519.68 4527.56,2519.68 ; 4527.56,2519.68 4527.56,3346.46 1181.1,3346.46 1181.1,2519.68 4527.56,2519.68

## Other copper
Bottom Layer:
  text "by J.M 01.2017" at 4435,2570 h55 r270